# Altium PCB maindoline.PcbDoc
Units mil, origin at the board's own origin, x right, y up, seen from the top; angles counter-clockwise.
Board outline 2640 x 2185 mil, 2 copper layers (Top Layer, Bottom Layer); 20 components, 18 nets, 104 pads, 2 vias.
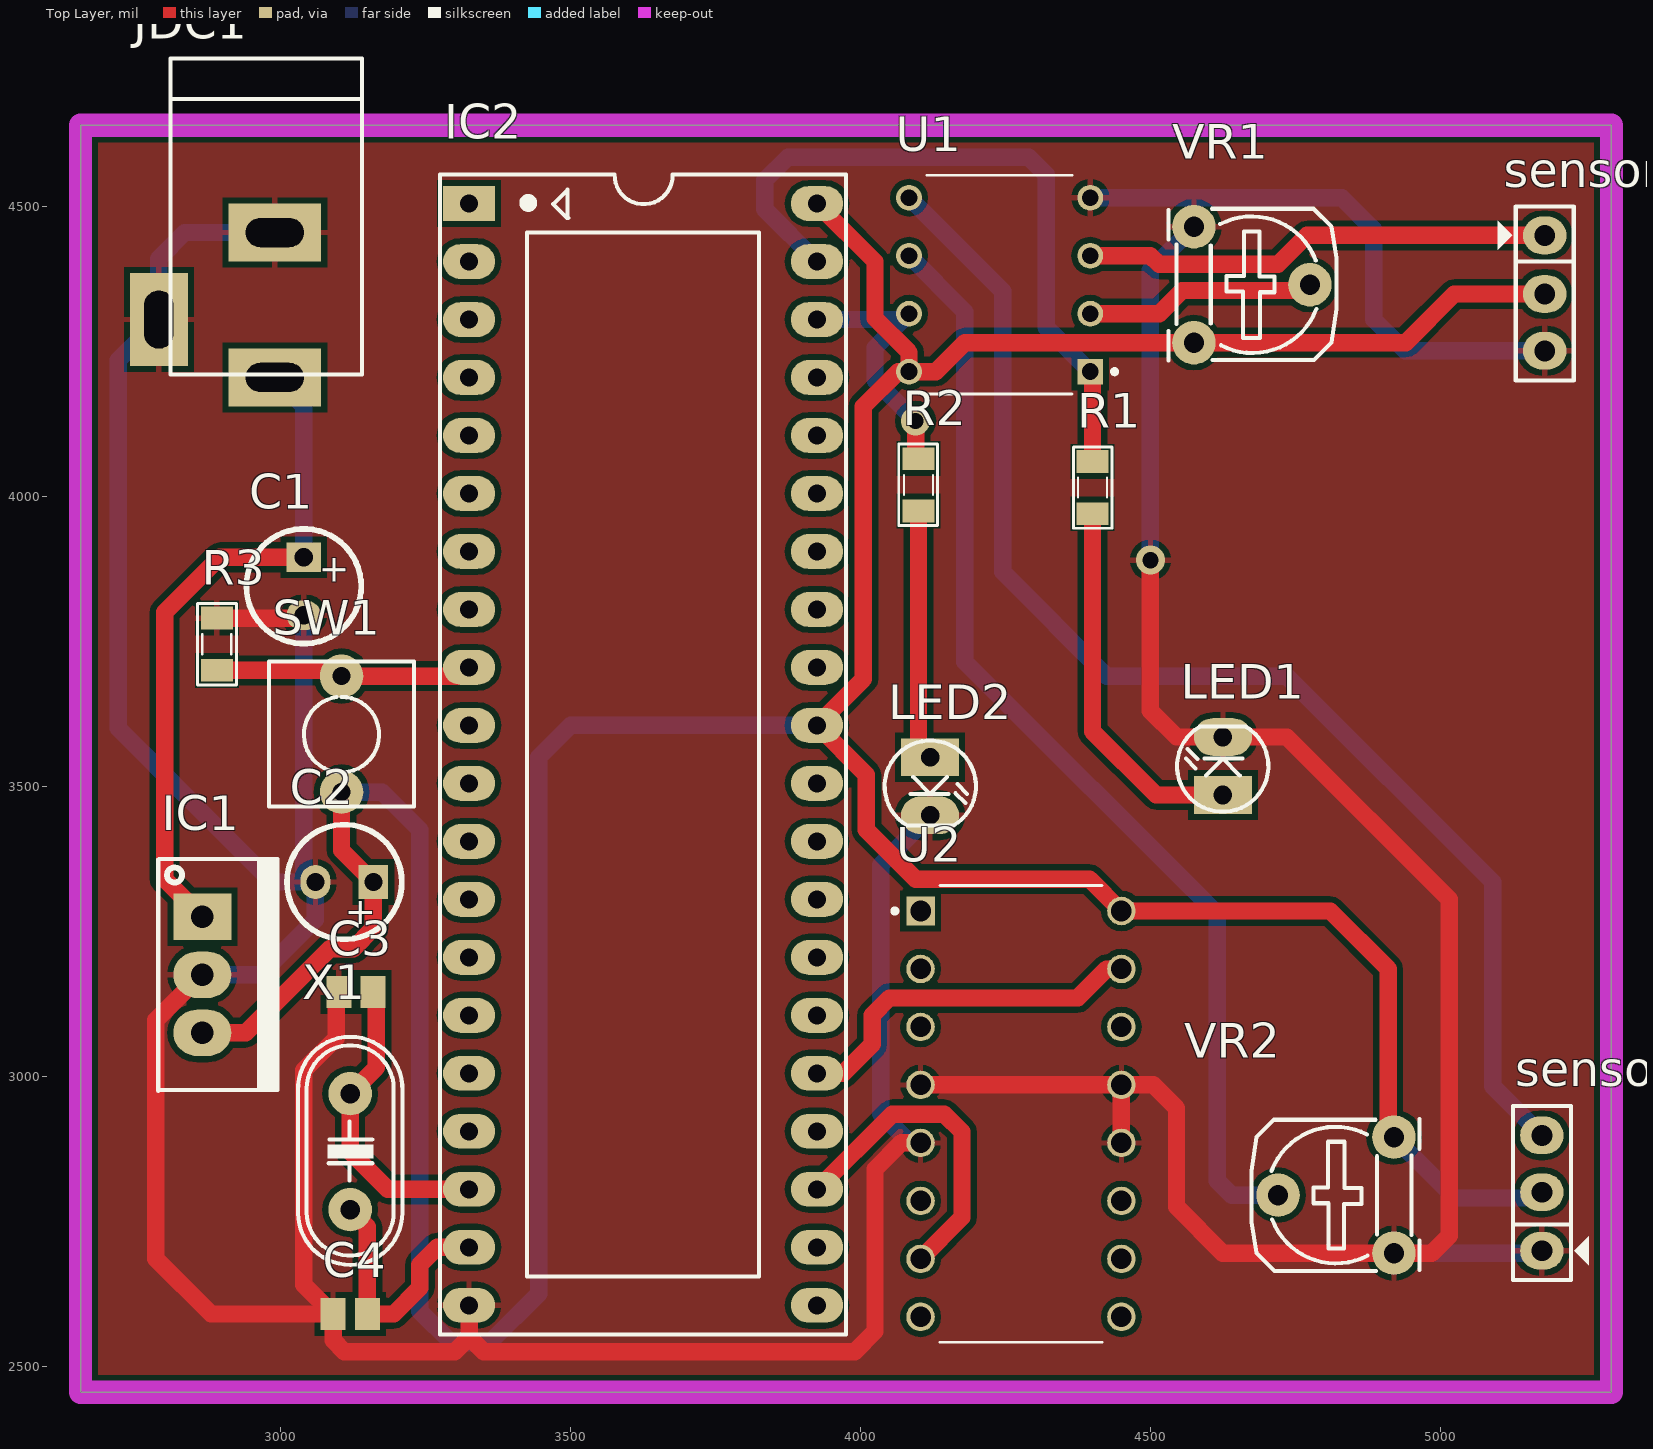
[diagram p0: Top Layer view]
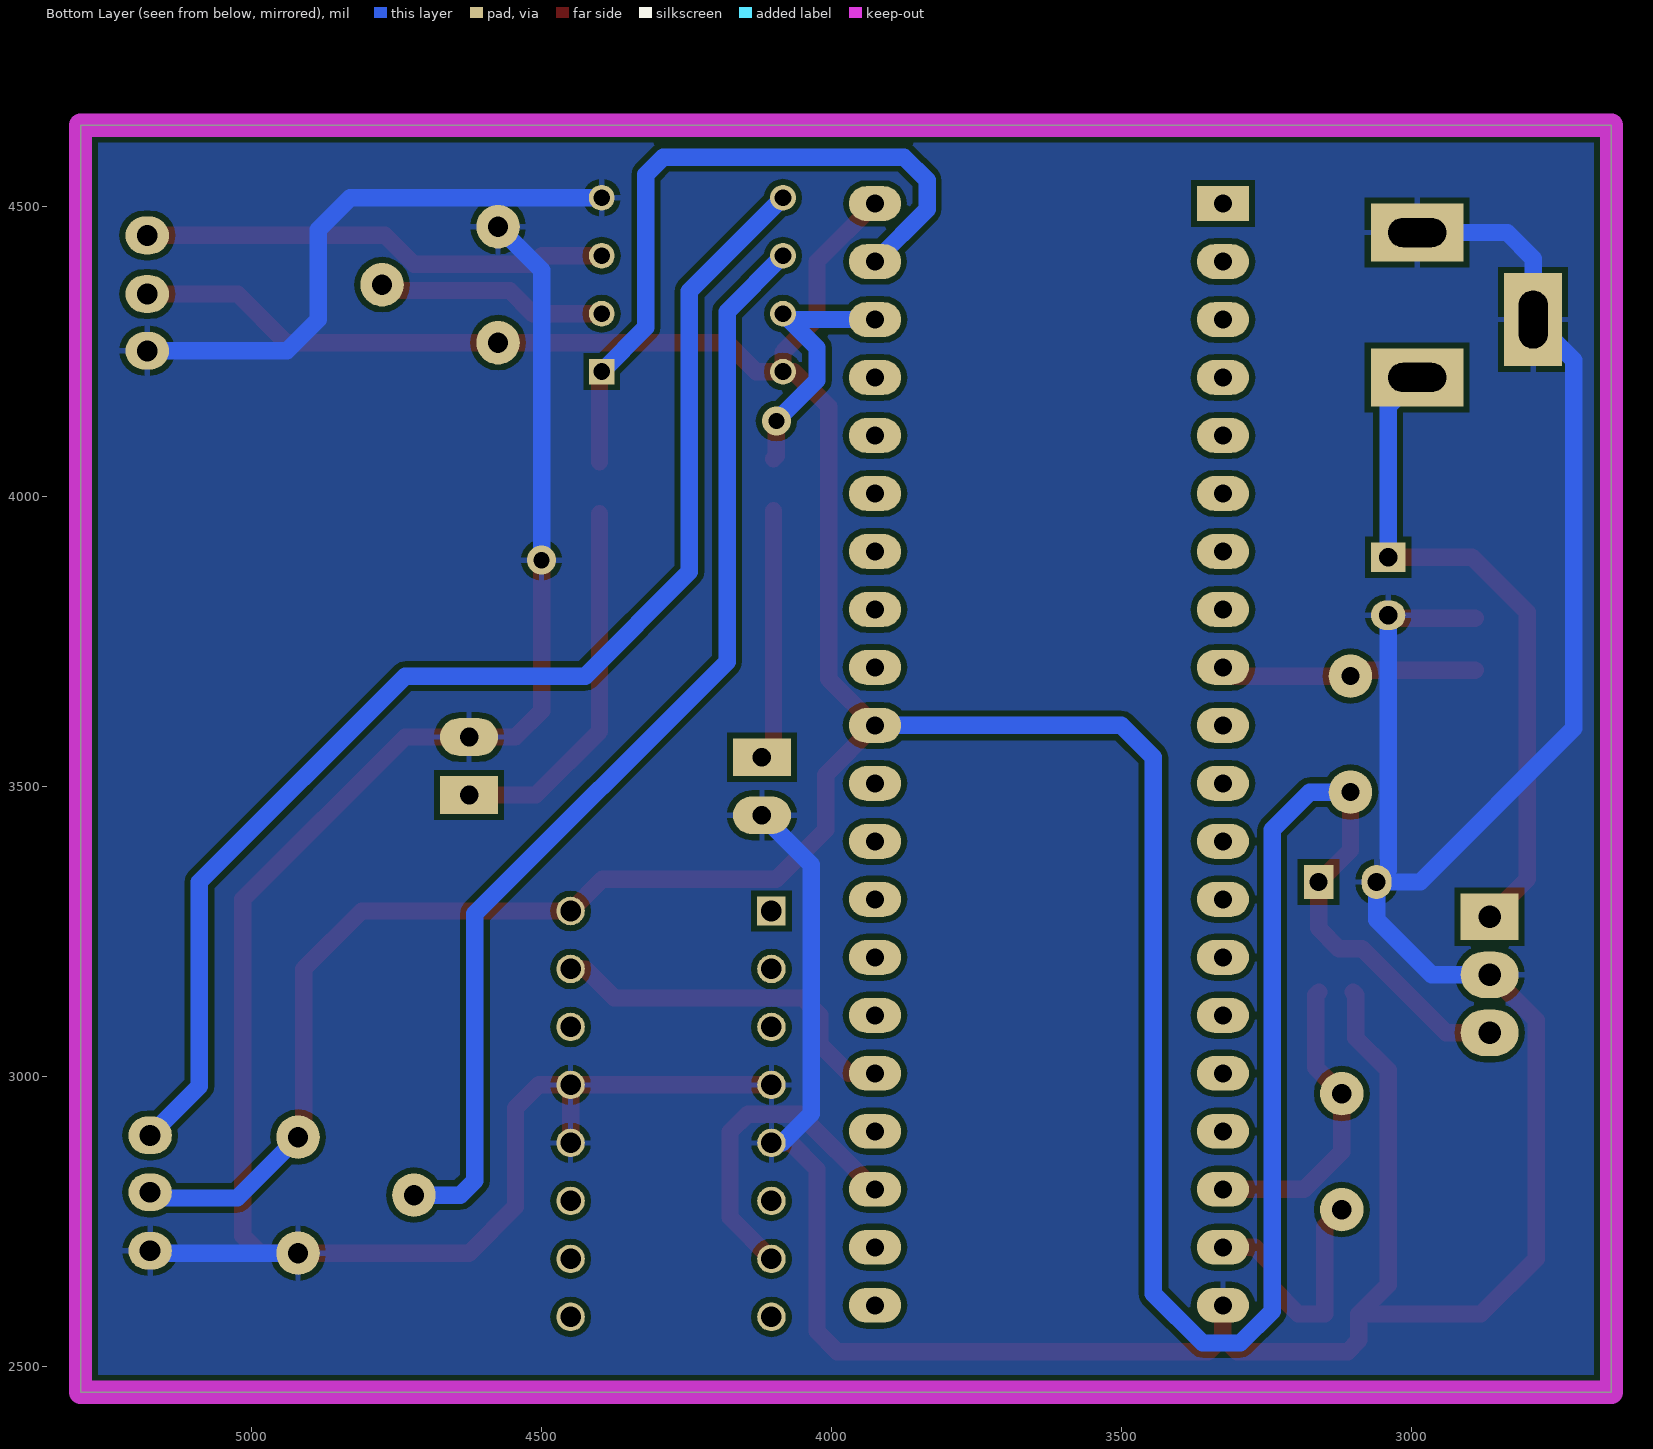
[diagram p1: Bottom Layer view, seen from below]
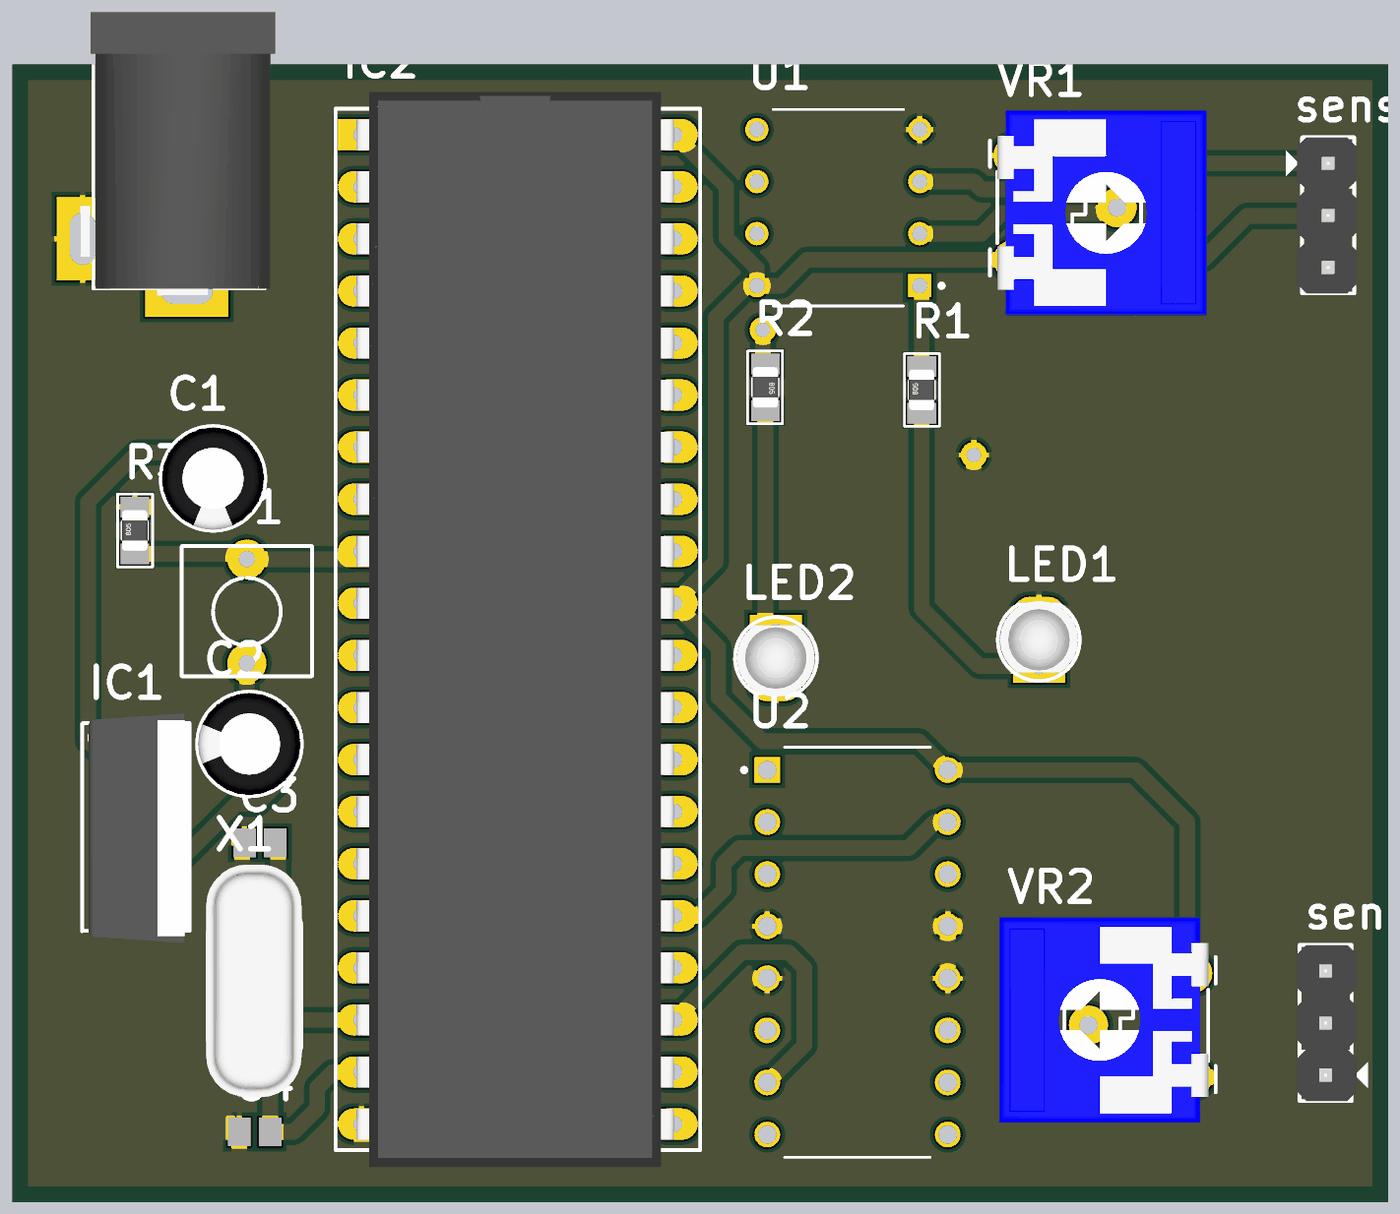
[diagram p2: 3D render of the assembled board from above, using the file's embedded part models]

## Layer stack, top to bottom
Top Solder: solder mask 0.4, Solder Resist, Dk 3.5
Top Layer: signal copper 1.4
Dielectric 1: dielectric 12.6, FR-4, Dk 4.8
Bottom Layer: signal copper 1.4
Bottom Solder: solder mask 0.4, Solder Resist, Dk 3.5

## Board outline
2655,2455 5295,2455 5295,4640 2655,4640

## Design rules (kind name [scope] priority, off if disabled: settings)
Clearance [All] p1: gap=10 ignorepadtopadclearanceinfootprint=FALSE except(0: Arc-Hole Track-Hole SMDPad-Hole THPad-Hole Via-Hole Fill-Hole Poly-Hole Region-Hole Text-Hole)
PolygonConnect [All] p1: connectstyle=Relief reliefconductorwidth=10 reliefentries=4 polygonreliefangle="90 Angle" airgapwidth=10
RoutingVias [All] p1: holewidth=28 width=50 viastyle="Through Hole" minholewidth=28 minwidth=50 maxholewidth=28 maxwidth=50
SolderMaskExpansion [All] p1: expansion=4
Width [All] p1: maxlimit=40 minlimit=20 preferedwidth=30
30 further rules are at their usual default settings.

## Components (designator, comment, footprint, x,y, rotation, side; value= is the part's Value field where it differs from the comment)
C1 "1000uF" C5mm 3040,3845 r270 top
C2 "10uF" C5mm 3110,3335 r180 top
C3 "22pF" C0805 3130,3145 r0 top value=33p
C4 "22pF" C0805 3120,2590 r0 top value=33p
IC1 "LM7805" QTO-220 2865,3275 r270 top
IC2 "AT89C52" DIP40/W0.6 3325,4505 r270 top
JDC1 "Jac DC" DC-IN 2890,4330 r270 top
LED1 "LED" LED-3 4625,3485 r90 top value="LED 3 ly Single Colour"
LED2 "LED" LED-3 4120,3550 r270 top value="LED 3 ly Single Colour"
R1 "1k" RES-SMD-0805 4400,4015 r90 top value="R1/4W - 1K"
R2 "1k" RES-SMD-0805 4100,4020 r270 top value="R1/4W - 1K"
R3 "1k" RES-SMD-0805 2890,3745 r90 top value="R1/4W - 1K"
sensor1 "Jumper 3" JP3 5180,4350 r270 top value=J3
sensor2 "Jumper 3" JP3 5175,2799 r90 top value=J3
SW1 "SW" SW2 3105,3490 r90 top value="SW chip 2 pin"
U1 "LM358N/NOPB" DIP794W45P254L959H508Q8 4240,4365 r180 top
U2 "L293D" DIP880W50P254L2000H510Q16 4276.77,2935 r0 top
VR1 "10K" VR 4575,4465 r270 top value="VR 10K"
VR2 "10K" VR 4920,2695 r90 top value="VR 10K"
X1 "4Mhz" XT2 3120,2870 r270 top

## Footprints (in the part's own frame and the unit in brackets; to place one, negate y for a bottom-side part, rotate by r counter-clockwise, add the part's x,y. Pads: shape width x height; smd on the part's side, far side on the other; paste and mask are expansions set on the pad)
C5mm [mm]
  rect 1.3x1.5 hole 0.8: 1(-1.27,0)
  oval 1.3x1.5 hole 0.8: 2(1.27,0)
  silkscreen extent -2.51,-2.51 2.51,2.51, body extent -2.5,-2.5 2.49,2.5, height 11.01
C0805 [mm] "Chip Capacitor, Body 2.0x1.3mm, IPC High Density"
  rect 1.1x1.4 smd: 1(-0.75,0) 2(0.75,0)
  body extent -1.1,-0.72 1.1,0.72, height 1.4
DC-IN [mil] "Jac DC input"
  rect 100x160 hole 50 slot 100 at 90 deg: 1(125,100) 2(-125,100)
  rect 160x100 hole 50 slot 100 at 0 deg: 3(25,-100)
  silkscreen extent -425,-80 120,250, body extent -410,-105 134,269, height 434
DIP40/W0.6 [mil] "40 PIN, W 600mil, Pin to pin 100mil"
  rect 60x90 hole 31: 1(0,0)
  oval 60x90 hole 31: 2(100,0) 3(200,0) 4(300,0) 5(400,0) 6(500,0) 7(600,0) 8(700,0) 9(800,0) 10(900,0) 11(1000,0) 12(1100,0) 13(1200,0) 14(1300,0) 15(1400,0) 16(1500,0) 17(1600,0) 18(1700,0) 19(1800,0) 20(1900,0) 21(1900,600) 22(1800,600) 23(1700,600) 24(1600,600) 25(1500,600) 26(1400,600) 27(1300,600) 28(1200,600) 29(1100,600) 30(1000,600) 31(900,600) 32(800,600) 33(700,600) 34(600,600) 35(500,600) 36(400,600) 37(300,600) 38(200,600) 39(100,600) 40(0,600)
  silkscreen extent -50,-50 1950,650, body extent -82,-10 1982,600, height 224
DIP794W45P254L959H508Q8 [mm]
  rect 1.13x1.13 hole 0.74: 1(-3.97,3.81)
  round 1.13 hole 0.74: 2(-3.97,1.27) 3(-3.97,-1.27) 4(-3.97,-3.81) 5(3.97,-3.81) 6(3.97,-1.27) 7(3.97,1.27) 8(3.97,3.81)
  silkscreen extent -5.13,-4.79 3.18,4.79
DIP880W50P254L2000H510Q16 [mm]
  rect 1.25x1.25 hole 0.9: 1(-4.4,8.89)
  round 1.25 hole 0.9: 2(-4.4,6.35) 3(-4.4,3.81) 4(-4.4,1.27) 5(-4.4,-1.27) 6(-4.4,-3.81) 7(-4.4,-6.35) 8(-4.4,-8.89) 9(4.4,-8.89) 10(4.4,-6.35) 11(4.4,-3.81) 12(4.4,-1.27) 13(4.4,1.27) 14(4.4,3.81) 15(4.4,6.35) 16(4.4,8.89)
  silkscreen extent -5.62,-10 3.55,10
JP3 [mil] "Jumper 3"
  oval 65x75 hole 36: 1(-100,0) 2(1,0) 3(99,0)
  silkscreen extent -150,-81 150,50, body extent -150,-60 150,55, height 355
LED-3 [mil] "LED 2 PIN, 3ly Only colour"
  rect 65x100 hole 32: 1(0,0)
  oval 65x100 hole 32: 2(100,0)
  silkscreen extent -29,-78 118,79, body extent -13,-75 125,75, height 217
QTO-220 [mil] "TO-220 - 1-2-3"
  rect 80x100 hole 39: 1(0,0)
  oval 80x100 hole 39: 2(100,0) 3(200,0)
  silkscreen extent -100,-76 300,130, body extent -119,-64 322,121, height 755
RES-SMD-0805 [mil]
  rect 39.37x55 smd: 1(-45,0) 2(45,0)
  silkscreen extent -70,-34 70,33, body extent -39,-25 39,25, height 31
SW2 [mil] "SW button 2pin, 250x 250 mil"
  round 75 hole 31: 1(0,0) 2(200,0)
  silkscreen extent -25,-125 225,125
VR [mil] "Resistor Variable"
  round 75 hole 35: 1(0,0) 2(100,200) 3(200,0)
  silkscreen extent -31,-44 231,246, body extent -87,-30 307,372, height 165
XT2 [mil] "Footpin for Crystal 2 pin"
  round 75 hole 34: 1(-100,0) 2(100,0)
  silkscreen extent -198,-90 195,90, body extent -233,-93 213,90, height 138

## Part data
C1 C2: library part "Cap Pol 5mm", "Polarized Capacitor (Axial)", LatestRevisionDate=17-Jul-2002, LatestRevisionNote="Re-released for DXP Platform.", PackageReference=POLAR0.8, Published=8-Jun-2000, Publisher="Altium Limited"
C3 C4: library part CapSMD, "Capacitor", LatestRevisionDate=17-Jul-2002, LatestRevisionNote="Re-released for DXP Platform.", PackageReference=RAD-0.3, Published=8-Jun-2000, Publisher="Altium Limited"
IC1: library part LM78xx, "On ap +, from + 5 to + 24VDC", =LM7808
IC2: "Atmel AT89C52, 8k Byte Flash Memory , 40 Pin"
JDC1: library part DCIN, "Jac DC input"
LED1 LED2: "LED Single colour Green and Red"
R1 R2 R3: library part R, "Resistor 1/4W"
sensor1 sensor2: library part JP3
SW1: library part SW2, "Switch button 2 pin"
U1: "<a href=\"https://snapeda.com/parts/LM358N/NOPB/Texas%20Instruments/view-part/?ref=eda\">Check prices</a>", Package=None, Availability=Unavailable, MP=LM358N/NOPB, Price=None
U2: "Push-Pull Four Channel Driver With Diode", ComponentLink1Description="Manufacturer Link", ComponentLink1URL=http://www.st.com/, ComponentLink2Description=Datasheet, ComponentLink2URL=http://www.st.com/stonline/products/literature/ds/1330/l293d.pdf, DatasheetVersion=Jun-1996, LatestRevisionDate=06-Jun-2005, LatestRevisionNote="Stylized 3D Model Added.", PackageDescription="DIP; 16 Leads; Row Spacing 7.62 mm; Pitch 2.54 mm", PackageReference=DIP16, PackageVersion=Apr-1996, Published=8-Jun-2000, Publisher="Altium Limited"
VR1 VR2: library part VR1, "Var Resistor"
X1: library part XT2, "Crystal For all Crystal 2pin."

## Via types
v1: diameter 50, hole 28, Top Layer to Bottom Layer, 2 vias

## Nets (pads, with @x,y where several pads share a name; then routed paths per layer and width w, separated by ;. In a path a pad name is that pad's centre, name@x,y a point inside that pad or via, vN(x,y) a via of type N, cw(c..) or ccw(c..) an arc to the next point about the centre after c; other vN are vias at no path point)
5V: C2.1 IC1.3 IC2.31 IC2.40 sensor1.2 sensor2.2 SW1.1 U1.8 U2.16 VR1.3 VR2.3 | length 7315.7
  Top Layer w30: IC1.3 2940,3075 3085,3220 3125,3220 3160,3255 C2.1 3105,3390 SW1.1 ; IC2.40 4025,4405 4025,4306.89 4083.7,4248.19 U1.8 ; VR2.3 4910,2905 4910,3185 4810,3285 U2.16 4395,3340 4095,3340 4010,3425 4010,3520 IC2.31 4005,3685 4005,4155 4065,4215 U1.8 ; sensor1.2 5024,4349 4940,4265 VR1.3 4180,4265 4130,4215 U1.8
  Bottom Layer w30: SW1.1 3175,3490 3240,3425 3240,2595 3295,2540 3360,2540 3445,2625 3445,3550 3500,3605 IC2.31 ; VR2.3 5025,2790 5165,2790 sensor2.2
9V: C1.1 IC1.1 JDC1.1 | length 1162
  Top Layer w30: IC1.1 2800,3340 2800,3800 2895,3895 C1.1
  Bottom Layer w30: JDC1.1 3040,4155 C1.1
dauam: U1.2 VR1.2 | length 399.4
  Top Layer w30: U1.2 4515,4315 4555,4355 4765,4355 VR1.2
dauduong: sensor1.1 U1.3 | length 810.6
  Top Layer w30: U1.3 4500,4415 4515,4400 4720,4400 4770,4450 sensor1.1
GND: C1.2 C2.2 C3.1 C4.1 IC1.2 IC2.20 JDC1.2 JDC1.3 LED1.2 LED2.2 R3.2 sensor1.3 sensor2.1 U1.4 U2.4 U2.5 U2.12 U2.13 VR1.1 VR2.1 | length 10571.9
  Top Layer w30: IC1.2 2863.08,3175 2785,3096.92 2785,2685 2880,2590 C4.1 ; R3.2 3035,3790 C1.2 ; C3.1 3095.94,3140.47 3095.94,3065.94 3040,3010 3040,2640.47 C4.1 ; IC2.20 3325,2550 ; U2.5 4070,2885 4025,2840 4025,2560 3990,2525 3350,2525 3325,2550 ; U2.4 U2.13 ; U2.12 U2.13 ; v1(4500,3890) 4500,3630 4545,3585 LED1.2 4735,3585 5015,3305 5015,2725 4985,2695 VR2.1 4625,2695 4545,2775 4545,2945 4505,2985 U2.13 ; C4.1 3090.47,2544.53 3110,2525 3300,2525 3325,2550
  Bottom Layer w30: IC1.2 2965,3175 3060,3270 C2.2 ; JDC1.2 2835,4455 2790,4410 JDC1.3 2720,4235 2720,3600 2985,3335 C2.2 ; C1.2 3040,3355 C2.2 ; U2.5 4085,2885 4035,2935 4035,3365 LED2.2 ; U1.4 4830,4515 4885,4460 4885,4305 4939,4251 sensor1.3 ; v1(4500,3890) 4500,4390 VR1.1 ; VR2.1 5171,2695 sensor2.1
NetC3_2: C3.2 IC2.18 X1.1 | length 527.8
  Top Layer w30: C3.2 3165,3139.53 3165,3015 X1.1 3120,2870 3185,2805 IC2.18
NetC4_2: C4.2 IC2.19 X1.2 | length 438.8
  Top Layer w30: X1.2 3149.53,2740.47 C4.2 3195,2590 3240,2635 3240,2675 3270,2705 IC2.19
NetIC2_9: IC2.9 R3.1 SW1.2 | length 445.4
  Top Layer w30: R3.1 3095,3700 SW1.2 3310,3690 IC2.9
NetIC2_23: IC2.23 U2.7 | length 565.1
  Top Layer w30: IC2.23 4054.61,2934.61 4144.61,2934.61 4175,2904.21 4175,2756.46 U2.7
NetIC2_25: IC2.25 U2.15 | length 628.8
  Top Layer w30: IC2.25 3970,3005 4020,3055 4020,3105 4050,3135 4375,3135 4425,3185 U2.15
NetIC2_39: IC2.39 R1.2 U1.1 | length 1219.4
  Top Layer w30: U1.1 4400,4211.3 R1.2
  Bottom Layer w30: IC2.39 3835,4495 3835,4545 3875,4585 4290,4585 4320,4555 4320,4291.3 U1.1
NetLED1_1: LED1.1 R1.1 | length 645.6
  Top Layer w30: R1.1 4400,3595 4510,3485 LED1.1
NetLED2_1: LED2.1 R2.2 | length 433.3
  Top Layer w30: R2.2 4100,3570 LED2.1
Netsensor2_3: sensor2.3 U1.5 | length 2250.6
  Bottom Layer w30: U1.5 4245,4353.7 4245,3870 4425,3690 4735,3690 5090,3335 5090,2983 sensor2.3
NetU1_6: U1.6 VR2.2 | length 1930.4
  Bottom Layer w30: U1.6 4180,4318.7 4180,3715 4615,3280 4615,2820 4640,2795 VR2.2
P0.1: IC2.38 R2.1 U1.7 | length 454.1
  Top Layer w30: v1(4095,4130) 4095,4070 R2.1
  Bottom Layer w30: IC2.38 U1.7@4073.7,4305 ; U1.7 U1.7@4073.7,4305 ; v1(4095,4130) 4025,4200 4025,4256.3 U1.7@4073.7,4305
P2.1: IC2.22
P2.3: IC2.24
pads on no net: IC2.1 IC2.2 IC2.3 IC2.4 IC2.5 IC2.6 IC2.7 IC2.8 IC2.10 IC2.11 IC2.12 IC2.13 IC2.14 IC2.15 IC2.16 IC2.17 IC2.21 IC2.26 IC2.27 IC2.28 IC2.29 IC2.30 IC2.32 IC2.33 IC2.34 IC2.35 IC2.36 IC2.37 U2.1 U2.2 U2.3 U2.6 U2.8 U2.9 U2.10 U2.11 U2.14

## Polygon pours and split planes (outlines as drawn)
GND on Bottom Layer "GND_top" (solid, pour order 10): 2655,4640 2660,4635 5290,4635 5295,4640 5295,2455 2655,2455 2655,4640
GND on Top Layer "GND_top" (solid, pour order 12): 2655,4640 5295,4640 5295,2455 5285,2465 2655,2465 2655,4640

## Keep-outs
Keep-Out Layer:
  the board outline again, w40

## Text inside footprints (layer, text, board x,y; h text height)
C1: Top Overlay "+" at 3073,3900 h47.24 r270
C2: Top Overlay "+" at 3165,3302 h47.24 r180